# EAGLE board BMS_adapter (EAGLE 9.1.3)
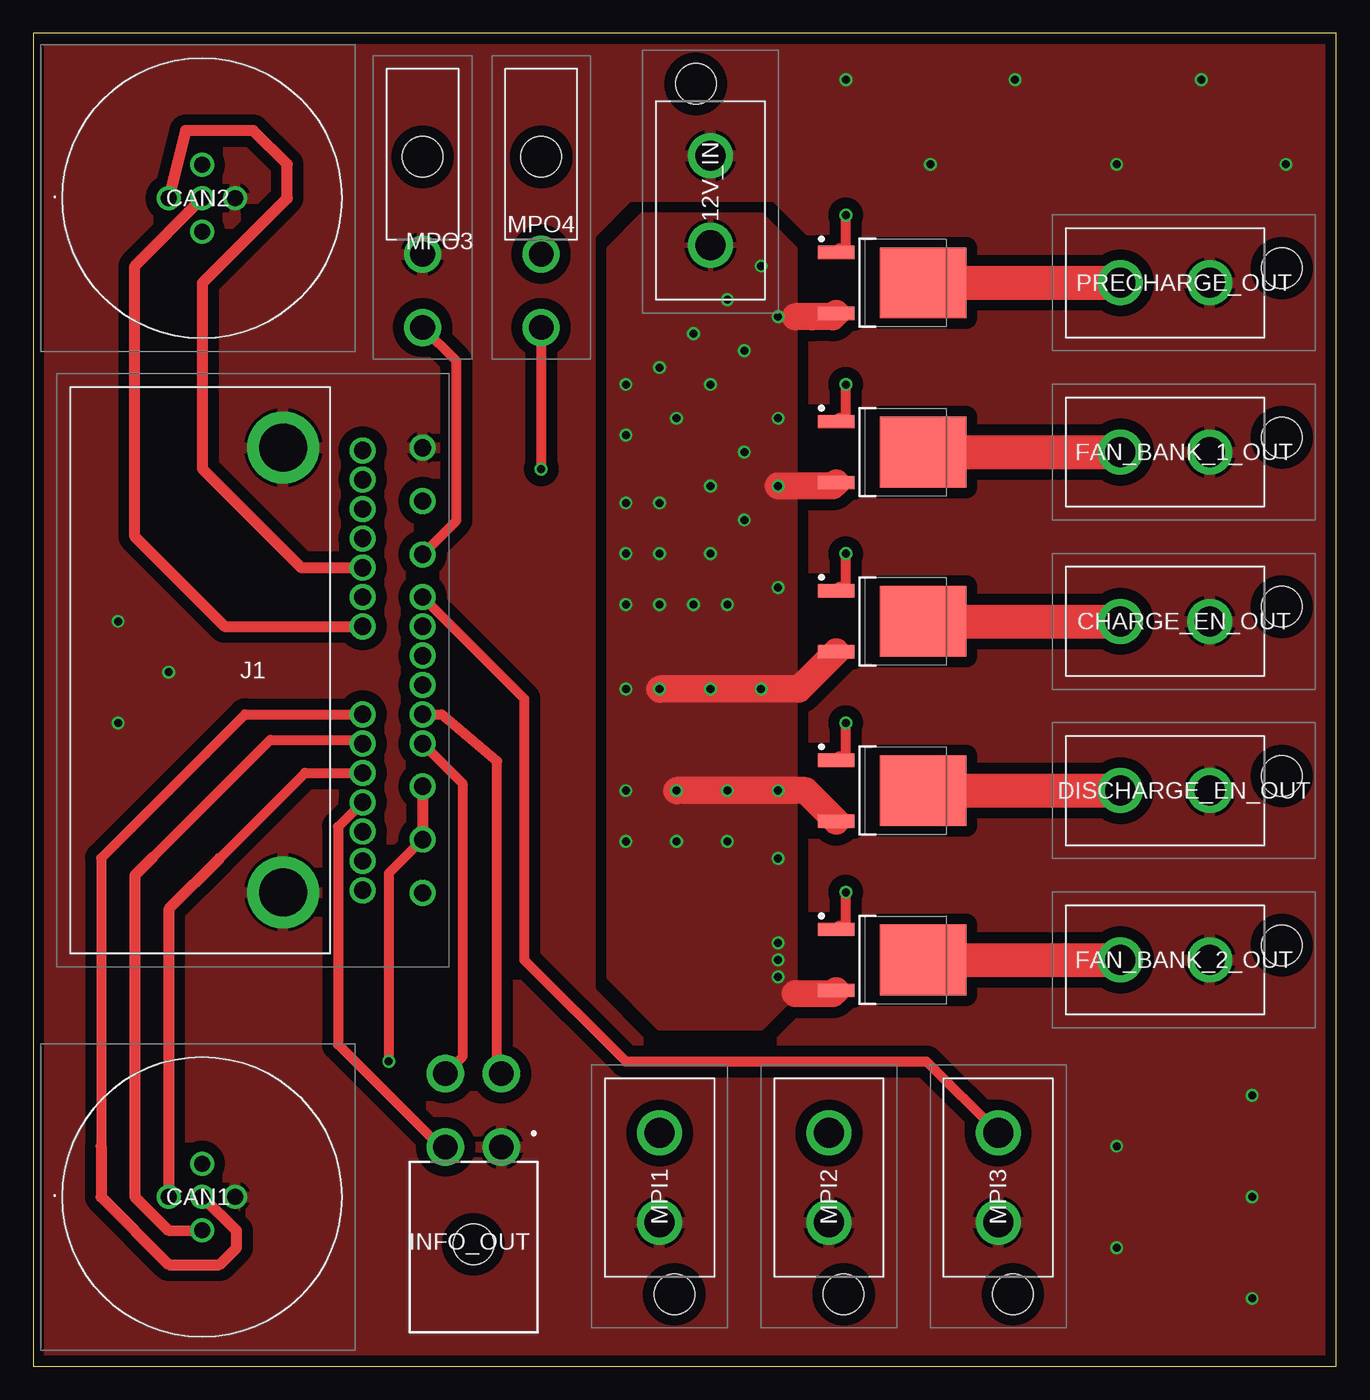
[diagram p0: board, top side]
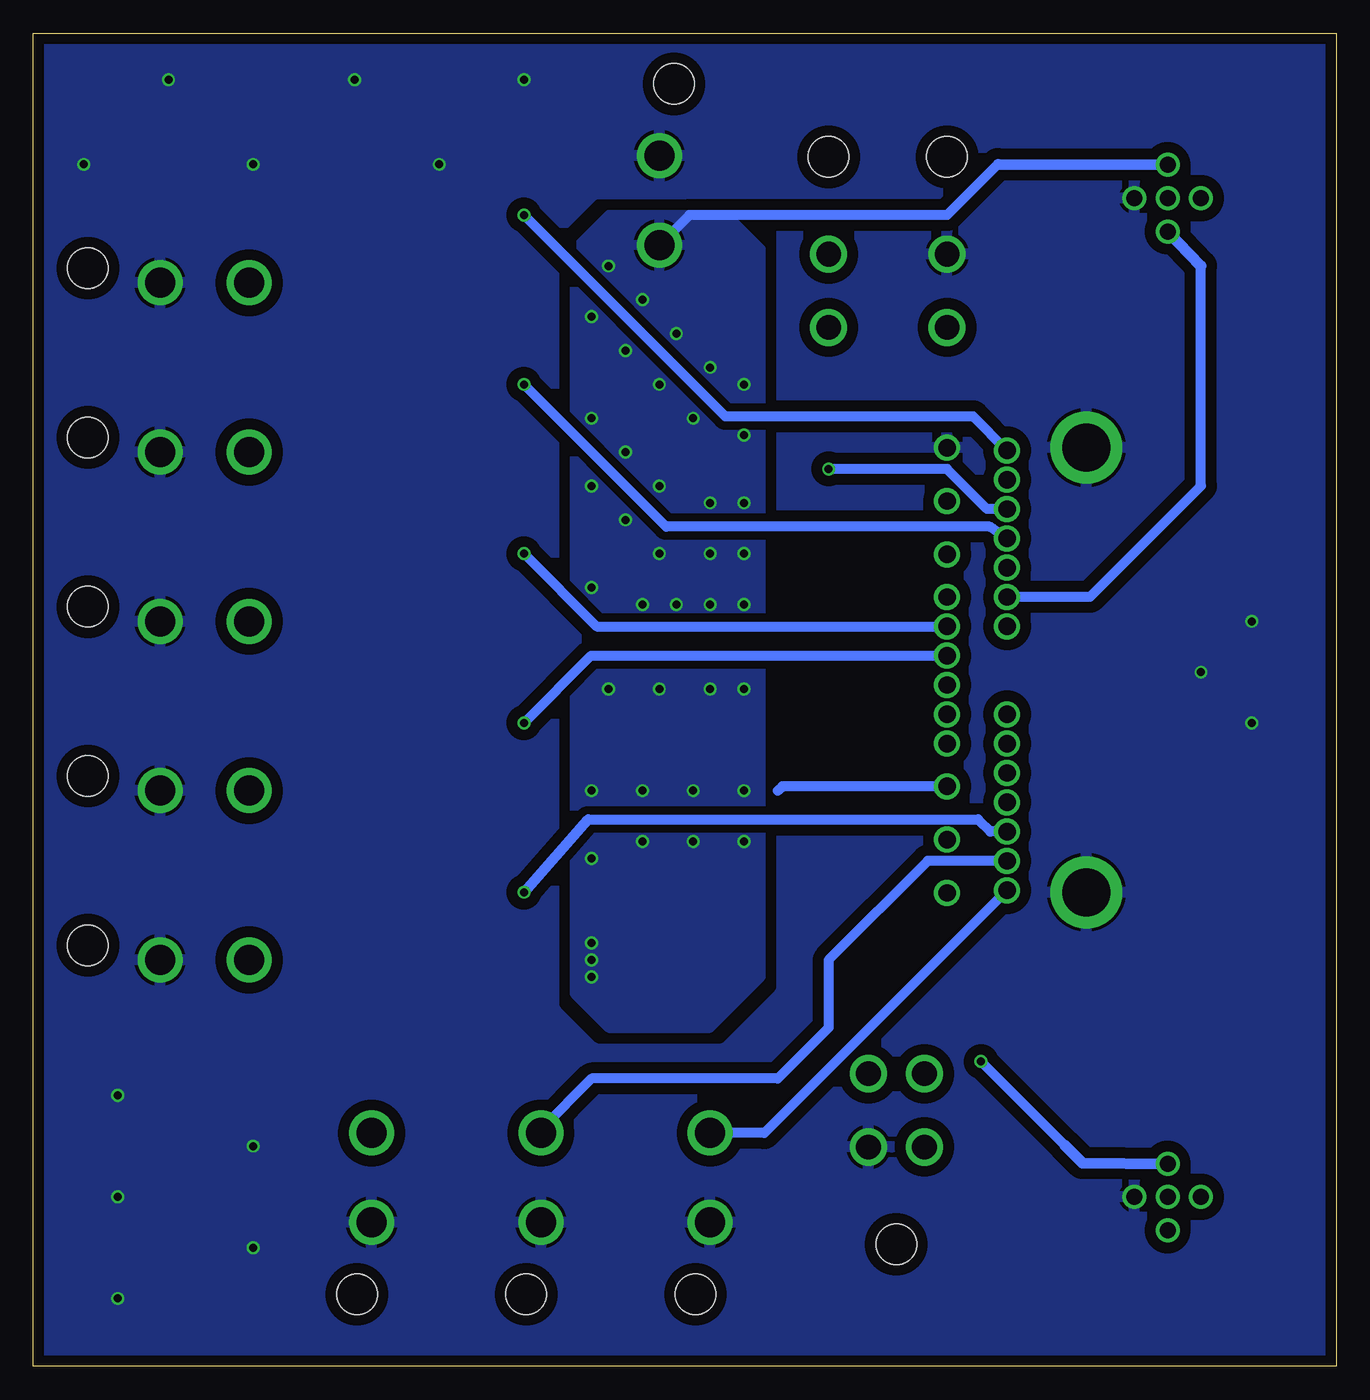
[diagram p1: board, bottom side, seen from below]

Size 97.77 x 100 mm. Coordinates in mm from the lower left corner, seen from the top.
Outline: 0,0 97.77,0 97.77,100 0,100 0,0
Copper layers (1*16): Top 0.0356mm / dielectric 1.5011mm / Bottom 0.0356mm
Design rules "LaenPCBOrder": minimum track width 6mil, minimum drill 13mil, track to track 6mil, track to pad 6mil, pad to pad 6mil, via to via 6mil, smd to smd 6mil, copper to edge 15mil, drill to drill 6mil, minimum pad ring 7mil, minimum via ring 7mil, stop-mask expansion 3mil, vias tented up to drill 0mil, thermal gap 10mil

## Footprints (pad centres in the part's own frame; a part is rotated, then mirrored left to right if it is on the bottom)
15311026 = drill 2.25 pad 3.375: 1 4.1,0; 2 10.8,0 | hole 3.05: 16.2,1.1
1200845179 = drill 1.2 pad 1.8: 1 0,0; 2 2.5,2.5; 3 5,0; 4 2.5,-2.5; 5 2.5,0
TO229P994X241-3N = smd 2.75 x 1: 1 -3.275,2.29; 3 -3.275,-2.29 | smd 6.5 x 5.3: 2 3.275,0
39-30-1040 = drill 1.85 pad 2.8: 1 2.1,13.9; 2 -2.1,13.9; 3 2.1,19.4; 4 -2.1,19.4 | hole 3.05: 0,6.6
13763573 = drill 1.3 pad 1.95: 1 0,0.05; 2 0,-3.95; 3 0,-7.95; 4 0,-11.15; 5 0,-13.35; 6 0,-15.55; 7 0,-17.75; 8 0,-19.95; 9 0,-22.15; 10 0,-25.35; 11 0,-29.35; 12 0,-33.35; 13 4.5,-0.15; 14 4.5,-2.35; 15 4.5,-4.55; 16 4.5,-6.75; 17 4.5,-8.95; 18 4.5,-11.15; 19 4.5,-13.35; 20 4.5,-19.95; 21 4.5,-22.15; 22 4.5,-24.35; 23 4.5,-26.55; 24 4.5,-28.75; 25 4.5,-30.95; 26 4.5,-33.15 | drill 3.6 pad 5.4: MH1 10.45,0; MH2 10.45,-33.35
0026013114 = drill 1.85 pad 2.775: 1 0,9.7; 2 0,4.2 | hole 3.05: 0,-3.1

## Placement (x,y rotation side)
12V_IN  15-31-1026  [15311026]  50.8,80.01 90 top
CAN1  1200845179  [1200845179]  10.16,12.7 0 top
CAN2  1200845179  [1200845179]  10.16,87.63 0 top
CHARGE_EN_MOS  SPD04P10PL_G  [TO229P994X241-3N]  63.5,55.88 0 top
CHARGE_EN_OUT  15-31-1026  [15311026]  77.47,55.88 0 top
DISCHARGE_EN_MOS  SPD04P10PL_G  [TO229P994X241-3N]  63.5,43.18 0 top
DISCHARGE_EN_OUT  15-31-1026  [15311026]  77.47,43.18 0 top
FAN_BANK_1_MOS  SPD04P10PL_G  [TO229P994X241-3N]  63.5,68.58 0 top
FAN_BANK_1_OUT  15-31-1026  [15311026]  77.47,68.58 0 top
FAN_BANK_2_MOS  SPD04P10PL_G  [TO229P994X241-3N]  63.5,30.48 0 top
FAN_BANK_2_OUT  15-31-1026  [15311026]  77.47,30.48 0 top
INFO_OUT  26-01-3115  [39-30-1040]  33.02,2.54 0 top
J1  1376357-3  [13763573]  29.21,35.56 180 top
MPI1  15-31-1026  [15311026]  46.99,21.59 270 top
MPI2  15-31-1026  [15311026]  59.69,21.59 270 top
MPI3  15-31-1026  [15311026]  72.39,21.59 270 top
MPO3  26-01-3114  [0026013114]  29.21,87.63 180 top
MPO4  26-01-3114  [0026013114]  38.1,87.63 180 top
PRECHARGE_MOS  SPD04P10PL_G  [TO229P994X241-3N]  63.5,81.28 0 top
PRECHARGE_OUT  15-31-1026  [15311026]  77.47,81.28 0 top

## Library data of the parts
12V_IN CHARGE_EN_OUT DISCHARGE_EN_OUT FAN_BANK_1_OUT FAN_BANK_2_OUT MPI1-MPI3 PRECHARGE_OUT = 15-31-1026; DESCRIPTION: Molex STANDARD .093 Series, Series Number 5025, 6.7mm Pitch 2 Way 1 Row Straight PCB Header, Solder Termination, 12A; HEIGHT: 15mm; MANUFACTURER_NAME: Molex; MANUFACTURER_PART_NUMBER: 15-31-1026; MOUSER_PART_NUMBER: 538-15-31-1026; MOUSER_PRICE-STOCK: https://www.mouser.com/Search/Refine.aspx?Keyword=538-15-31-1026; RS_PART_NUMBER: 6700289; RS_PRICE-STOCK: https://uk.rs-online.com/web/p/products/6700289
CAN1 CAN2 = SamacSys_Parts; DESCRIPTION: REC U12 5P AC FE M16 BM SOL SHD; HEIGHT: 24.8mm; MANUFACTURER_NAME: Molex; MANUFACTURER_PART_NUMBER: 1200845179; MOUSER_PART_NUMBER: 538-1200845179; MOUSER_PRICE-STOCK: https://www.mouser.com/Search/Refine.aspx?Keyword=538-1200845179
CHARGE_EN_MOS DISCHARGE_EN_MOS FAN_BANK_1_MOS FAN_BANK_2_MOS PRECHARGE_MOS = SPD04P10PL G
INFO_OUT = SamacSys_Parts; ALLIED_NUMBER: E5291951; ALLIED_PRICE-STOCK: https://www.alliedelec.com/molex-incorporated-26-01-3115/E5291951/; DESCRIPTION: Headers & Wire Housings 4P MINIFIT JR RA DR /PEGS 15AU V2; HEIGHT: mm; MANUFACTURER_NAME: Molex; MANUFACTURER_PART_NUMBER: 26-01-3115; MOUSER_PART_NUMBER: 538-26-01-3115; MOUSER_PRICE-STOCK: https://www.mouser.com/Search/Refine.aspx?Keyword=538-26-01-3115
J1 = SamacSys_Parts; ALLIED_NUMBER: 70283837; ALLIED_PRICE-STOCK: https://www.alliedelec.com/teconnectivity-1376357-3/70283837/; DESCRIPTION: Automotive Connectors 025/090 CAP HSG 26P; HEIGHT: 18.1mm; MANUFACTURER_NAME: TE Connectivity; MANUFACTURER_PART_NUMBER: 1376357-3; MOUSER_PART_NUMBER: 571-1376357-3; MOUSER_PRICE-STOCK: https://www.mouser.com/Search/Refine.aspx?Keyword=571-1376357-3
MPO3 MPO4 = SamacSys_Parts; DESCRIPTION: MiniFit Jr RA DR /Pegs 15Au V2 2Ckt Tray; HEIGHT: 9mm; MANUFACTURER_NAME: Molex; MANUFACTURER_PART_NUMBER: 26-01-3114; MOUSER_PART_NUMBER: 538-26-01-3114; MOUSER_PRICE-STOCK: https://www.mouser.com/Search/Refine.aspx?Keyword=538-26-01-3114; RS_PART_NUMBER: 1791870P; RS_PRICE-STOCK: http://uk.rs-online.com/web/p/products/1791870P

## Nets
12V: 12V_IN.1 CAN1.2 CAN2.2 CHARGE_EN_MOS.3 DISCHARGE_EN_MOS.3 FAN_BANK_1_MOS.3 FAN_BANK_2_MOS.3 J1.2 J1.3 PRECHARGE_MOS.3
CAN1_H: CAN1.4 J1.18
CAN1_L: CAN1.5 J1.19
CAN1_SHIELD: CAN1.1 J1.17
CAN2_H: CAN2.4 J1.21
CAN2_L: CAN2.5 J1.20
CAN2_SHIELD: CAN2.1 J1.22
GND: 12V_IN.2 CAN1.3 CAN2.3 CHARGE_EN_OUT.2 DISCHARGE_EN_OUT.2 FAN_BANK_1_OUT.2 FAN_BANK_2_OUT.2 INFO_OUT.1 J1.12 J1.MH1 J1.MH2 MPI1.2 MPI2.2 MPI3.2 MPO3.2 PRECHARGE_OUT.2
GND1: MPO4.2
N$1: J1.26 PRECHARGE_MOS.1
N$2: FAN_BANK_1_MOS.1 J1.23
N$3: FAN_BANK_2_MOS.1 J1.15
N$4: DISCHARGE_EN_MOS.1 J1.7
N$6: J1.10 MPO3.1
N$7: J1.9 MPI3.1
N$8: J1.13 MPI1.1
N$9: J1.14 MPI2.1
N$10: J1.24 MPO4.1
N$11: INFO_OUT.3 J1.5
N$12: INFO_OUT.4 J1.4
N$13: INFO_OUT.2 J1.16
N$14: FAN_BANK_1_MOS.2 FAN_BANK_1_OUT.1
N$23: DISCHARGE_EN_MOS.2 DISCHARGE_EN_OUT.1
N$25: CHARGE_EN_MOS.1 J1.8
N$26: FAN_BANK_2_MOS.2 FAN_BANK_2_OUT.1
N$28: CHARGE_EN_MOS.2 CHARGE_EN_OUT.1
N$30: PRECHARGE_MOS.2 PRECHARGE_OUT.1

## Tracks (layer width: path | path; a pad name or v marks a point on that pad's centre or on a via)
12V  (via drill 0.6)
  Top 0.762: J1.2 26.67,36.97 v26.67,22.86
  Top 0.813: J1.3 J1.2
  Top 2.032: FAN_BANK_2_MOS.3 59.98,27.94 57.15,27.94 | FAN_BANK_1_MOS.3 59.98,66.04 v55.88,66.04 | PRECHARGE_MOS.3 59.98,78.74 58.42,78.74 57.15,78.74 | CHARGE_EN_MOS.3 57.44,50.8 v46.99,50.8 | DISCHARGE_EN_MOS.3 57.94,43.18 v48.26,43.18
  Bottom 0.762: 25.4,90.17 29.21,86.36 48.55,86.36 12V_IN.1 | v26.67,22.86 20.4,16.59 | J1.3 41.58,43.51 41.91,43.18
  Bottom 0.813: 25.4,90.17 CAN2.2 | 20.4,16.59 19.05,15.24 CAN1.2
  other vias: 55.88,78.74 53.34,76.2 53.34,63.5 55.88,30.48 50.8,50.8 50.8,73.66 48.26,71.12 44.45,69.85 55.88,71.12 53.34,68.58 50.8,66.04 44.45,64.77 44.45,60.96 46.99,60.96 50.8,60.96 44.45,57.15 46.99,57.15 49.53,57.15 55.88,58.42 44.45,50.8 54.61,50.8 44.45,43.18 52.07,43.18 55.88,43.18 44.45,39.37 48.26,39.37 52.07,39.37 55.88,38.1 55.88,31.75 55.88,29.21 46.99,64.77 44.45,73.66 46.99,74.93 49.53,77.47 52.07,80.01 54.61,82.55 52.07,57.15
  pour Top (isolate 0.813): 48.26,86.36 54.61,86.36 57.15,83.82 57.15,27.94 54.61,25.4 46.99,25.4 43.18,29.21 43.18,81.28 43.18,83.82 45.72,86.36
  pour Bottom (isolate 0.61): 45.72,86.36 54.61,86.36 57.15,83.82 57.15,27.94 54.61,25.4 46.99,25.4 43.18,29.21 43.18,83.82
CAN1_H
  Top 0.762: 8.97,38.18 17.78,46.99 24.43,46.99 J1.18
  Top 0.813: 8.97,38.18 7.62,36.83 7.62,12.7 10.16,10.16 CAN1.4
CAN1_L
  Top 0.762: J1.19 15.89,48.91 5.08,38.1 5.08,16.51
  Top 0.813: 5.08,16.51 5.08,12.7 10.16,7.62 13.97,7.62 15.24,8.89 15.24,10.16 CAN1.5
CAN1_SHIELD
  Top 0.762: J1.17 20.38,44.51 13.97,38.1
  Top 0.813: 13.97,38.1 10.16,34.29 CAN1.1
CAN2_H
  Bottom 0.762: 10.16,82.55 10.16,66.04 18.49,57.71 J1.21
  Bottom 0.813: 10.16,82.55 CAN2.4
CAN2_L
  Top 0.813: J1.20 14.34,55.51 7.62,62.23 7.62,82.55 CAN2.5
CAN2_SHIELD
  Top 0.813: J1.22 20.1,59.91 12.7,67.31 12.7,81.28 19.05,87.63 19.05,90.17 16.51,92.71 11.43,92.71 CAN2.1
GND  (via drill 0.6)
  other vias: 6.35,48.26 10.16,52.07 6.35,55.88 60.96,96.52 67.31,90.17 73.66,96.52 81.28,90.17 87.63,96.52 93.98,90.17 91.44,20.32 81.28,16.51 91.44,12.7 81.28,8.89 91.44,5.08
  pour Top (isolate 0.813, rank 6): 0,100.33 97.79,100.33 97.79,0 0,0
  pour Bottom (isolate 0.813, rank 6): 0,100.33 97.79,100.33 97.79,0 0,0
N$1  (via drill 0.6)
  Top 0.762: 60.96,83.82 v60.96,86.36
  Top 0.813: PRECHARGE_MOS.1 60.48,83.82 60.96,83.82
  Bottom 0.762: J1.26 27.25,71.25 45.85,71.25 v60.96,86.36
N$2  (via drill 0.6)
  Top 0.762: 60.96,71.12 v60.96,73.66
  Top 0.813: FAN_BANK_1_MOS.1 60.48,71.12 60.96,71.12
  Bottom 0.762: J1.23 26,62.99 50.29,62.99 v60.96,73.66
N$3  (via drill 0.6)
  Top 0.762: 60.96,33.02 v60.96,35.56
  Top 0.813: FAN_BANK_2_MOS.1 60.48,33.02 60.96,33.02
  Bottom 0.762: v60.96,35.56 56.14,41.02 26.89,41.02 25.98,40.11 J1.15
N$4  (via drill 0.6)
  Top 0.762: 60.96,45.72 v60.96,48.26
  Top 0.813: DISCHARGE_EN_MOS.1 60.48,45.72 60.96,45.72
  Bottom 0.762: v60.96,48.26 55.91,53.31 J1.7
N$6
  Top 0.762: J1.10 31.75,63.45 31.75,75.39 MPO3.1
N$7
  Top 0.762: J1.9 36.83,50.09 36.83,30.48 44.45,22.86 67.02,22.86 MPI3.1
N$8
  Bottom 0.762: J1.13 42.93,17.49 MPI1.1
N$9
  Bottom 0.762: J1.14 30.67,37.91 38.1,30.48 38.1,25.4 41.91,21.59 55.88,21.59 59.69,17.78 MPI2.1
N$10  (via drill 0.6)
  Top 0.762: MPO4.1 v38.1,67.31
  Bottom 0.762: J1.24 26.21,64.31 29.21,67.31 v38.1,67.31
N$11
  Top 0.762: INFO_OUT.3 34.8,21.94 34.8,45.37 30.63,48.91 J1.5
N$12
  Top 0.762: J1.4 32.19,43.73 32.19,23.21 INFO_OUT.4
N$13
  Top 0.762: J1.16 22.86,40.46 22.86,24.13 30.55,16.44 INFO_OUT.2
N$14
  Top 2.54: FAN_BANK_1_MOS.2 FAN_BANK_1_OUT.1
N$23
  Top 2.54: DISCHARGE_EN_MOS.2 DISCHARGE_EN_OUT.1
N$25  (via drill 0.6)
  Top 0.762: 60.96,58.42 v60.96,60.96
  Top 0.813: CHARGE_EN_MOS.1 60.48,58.42 60.96,58.42
  Bottom 0.762: v60.96,60.96 55.51,55.51 J1.8
N$26
  Top 2.54: FAN_BANK_2_MOS.2 FAN_BANK_2_OUT.1
N$28
  Top 2.54: CHARGE_EN_MOS.2 CHARGE_EN_OUT.1
N$30
  Top 2.54: PRECHARGE_MOS.2 PRECHARGE_OUT.1